# Allegro board pcb.brd
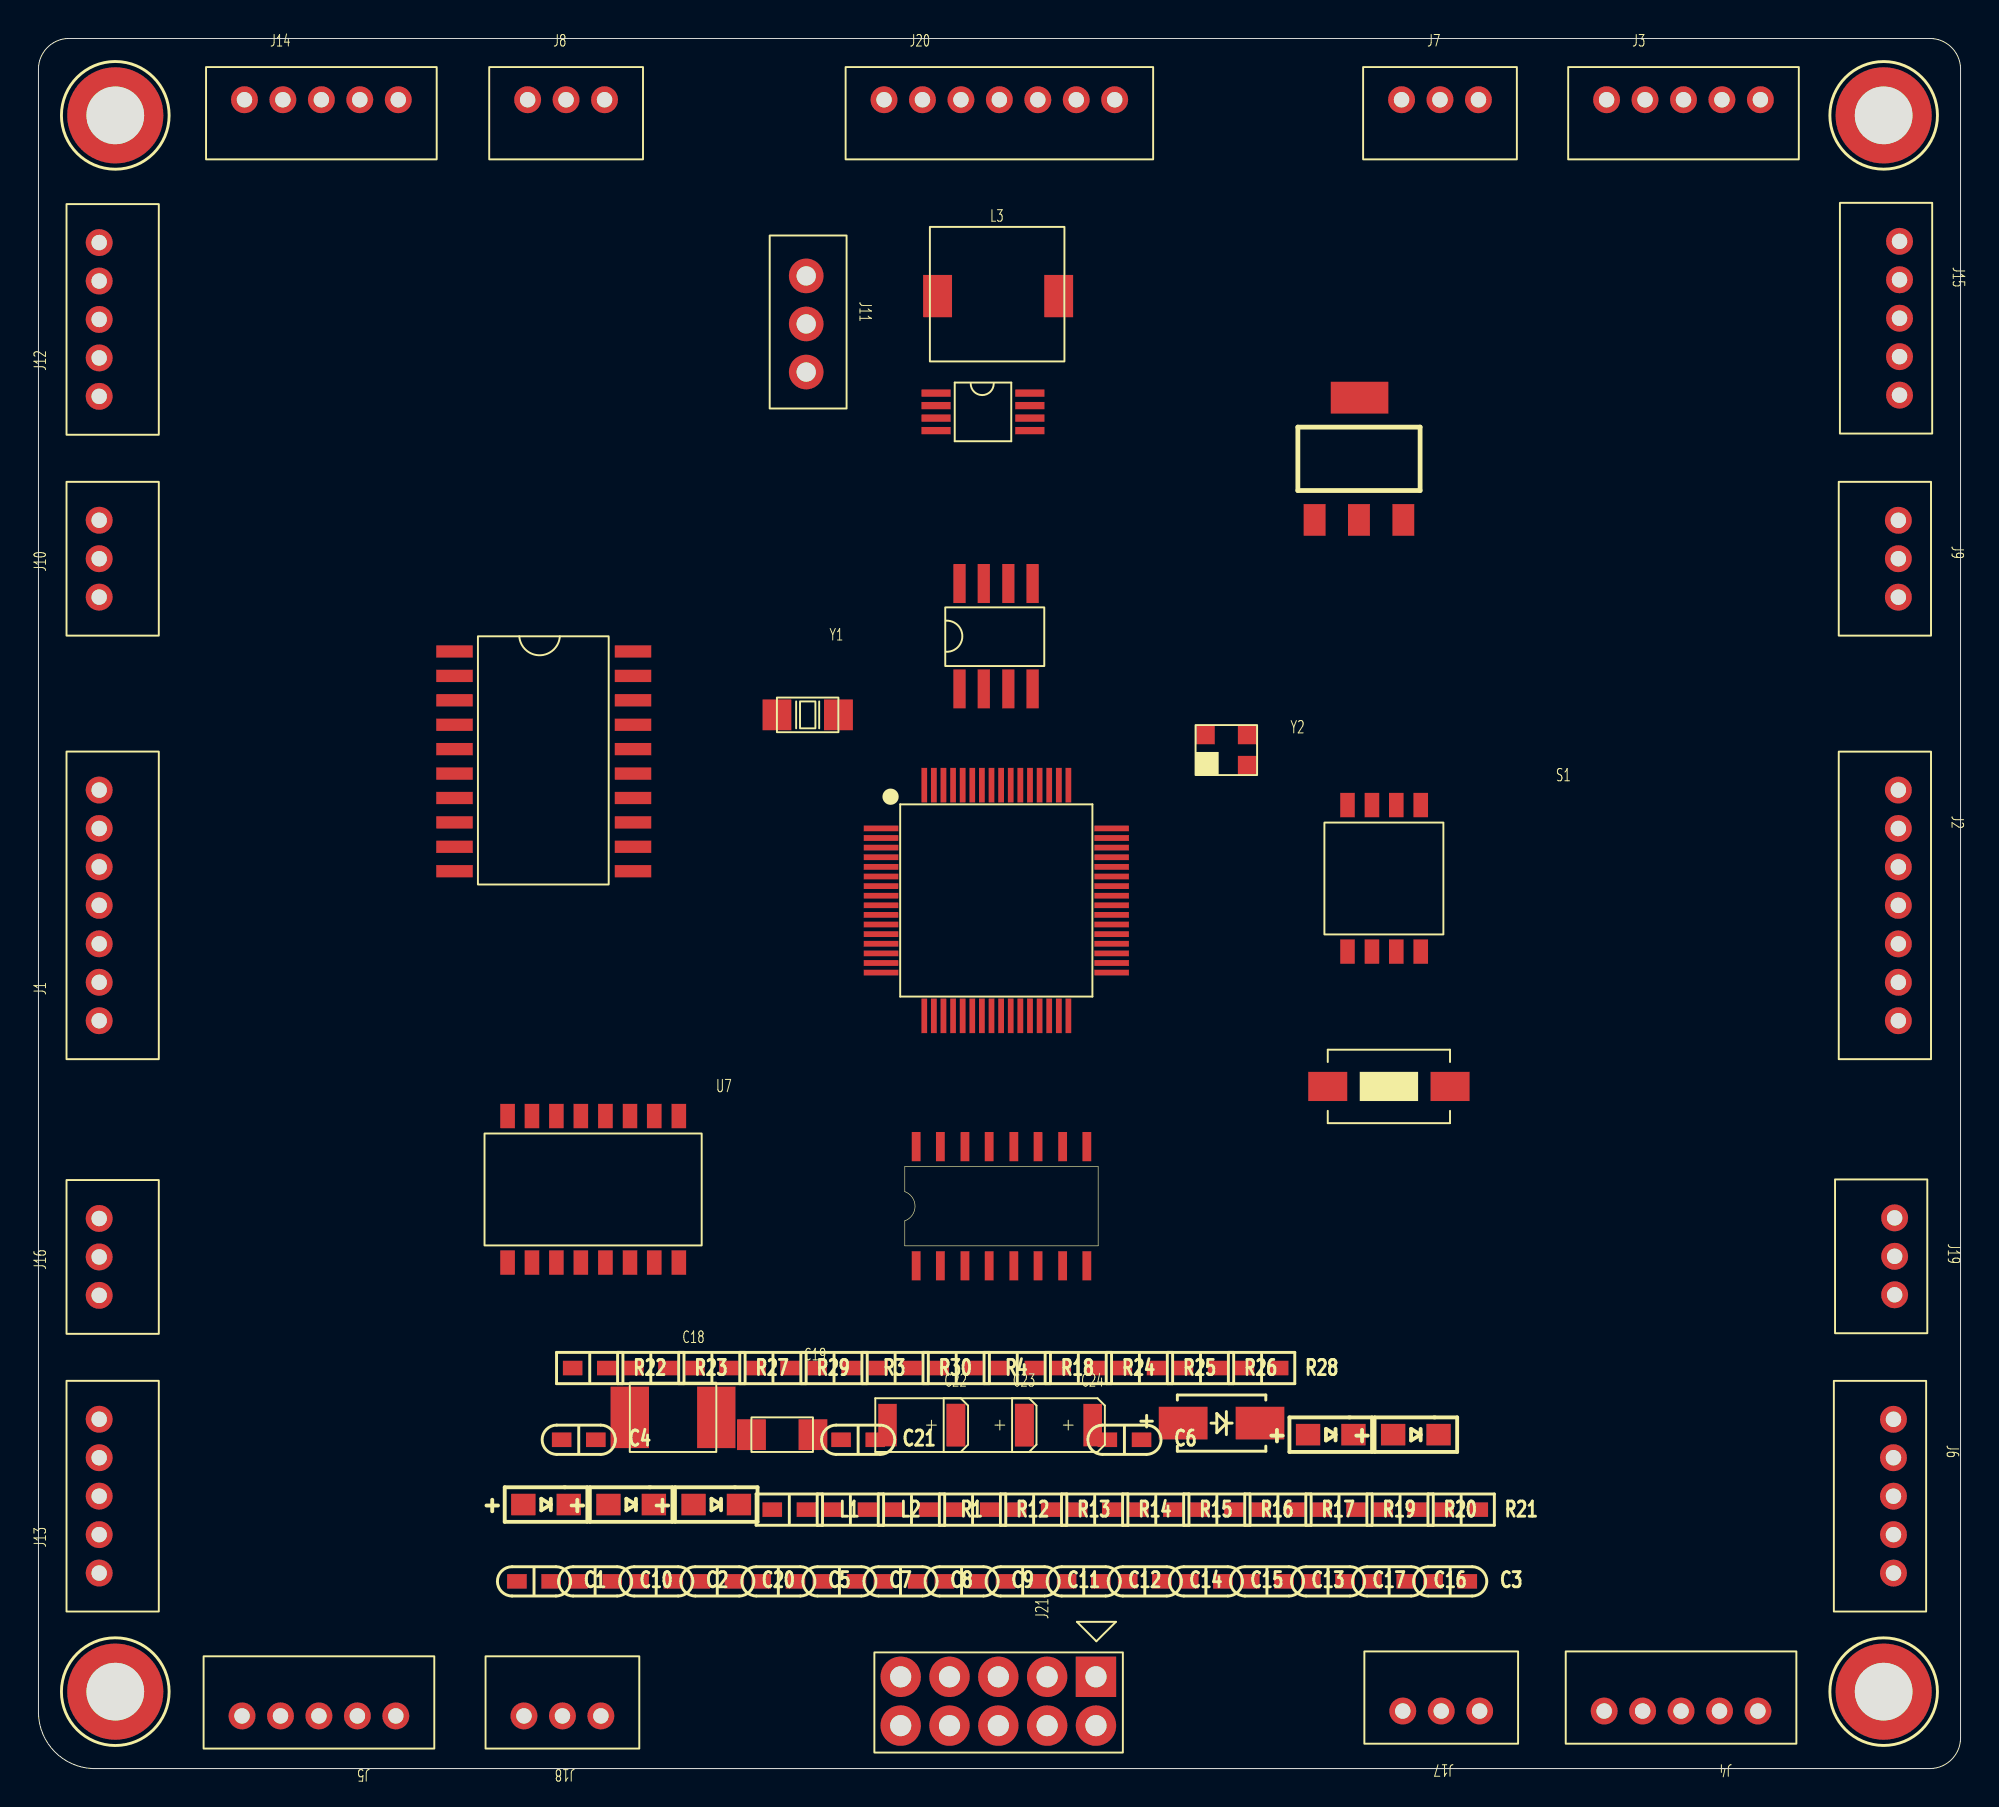
[diagram p0: board, top side]
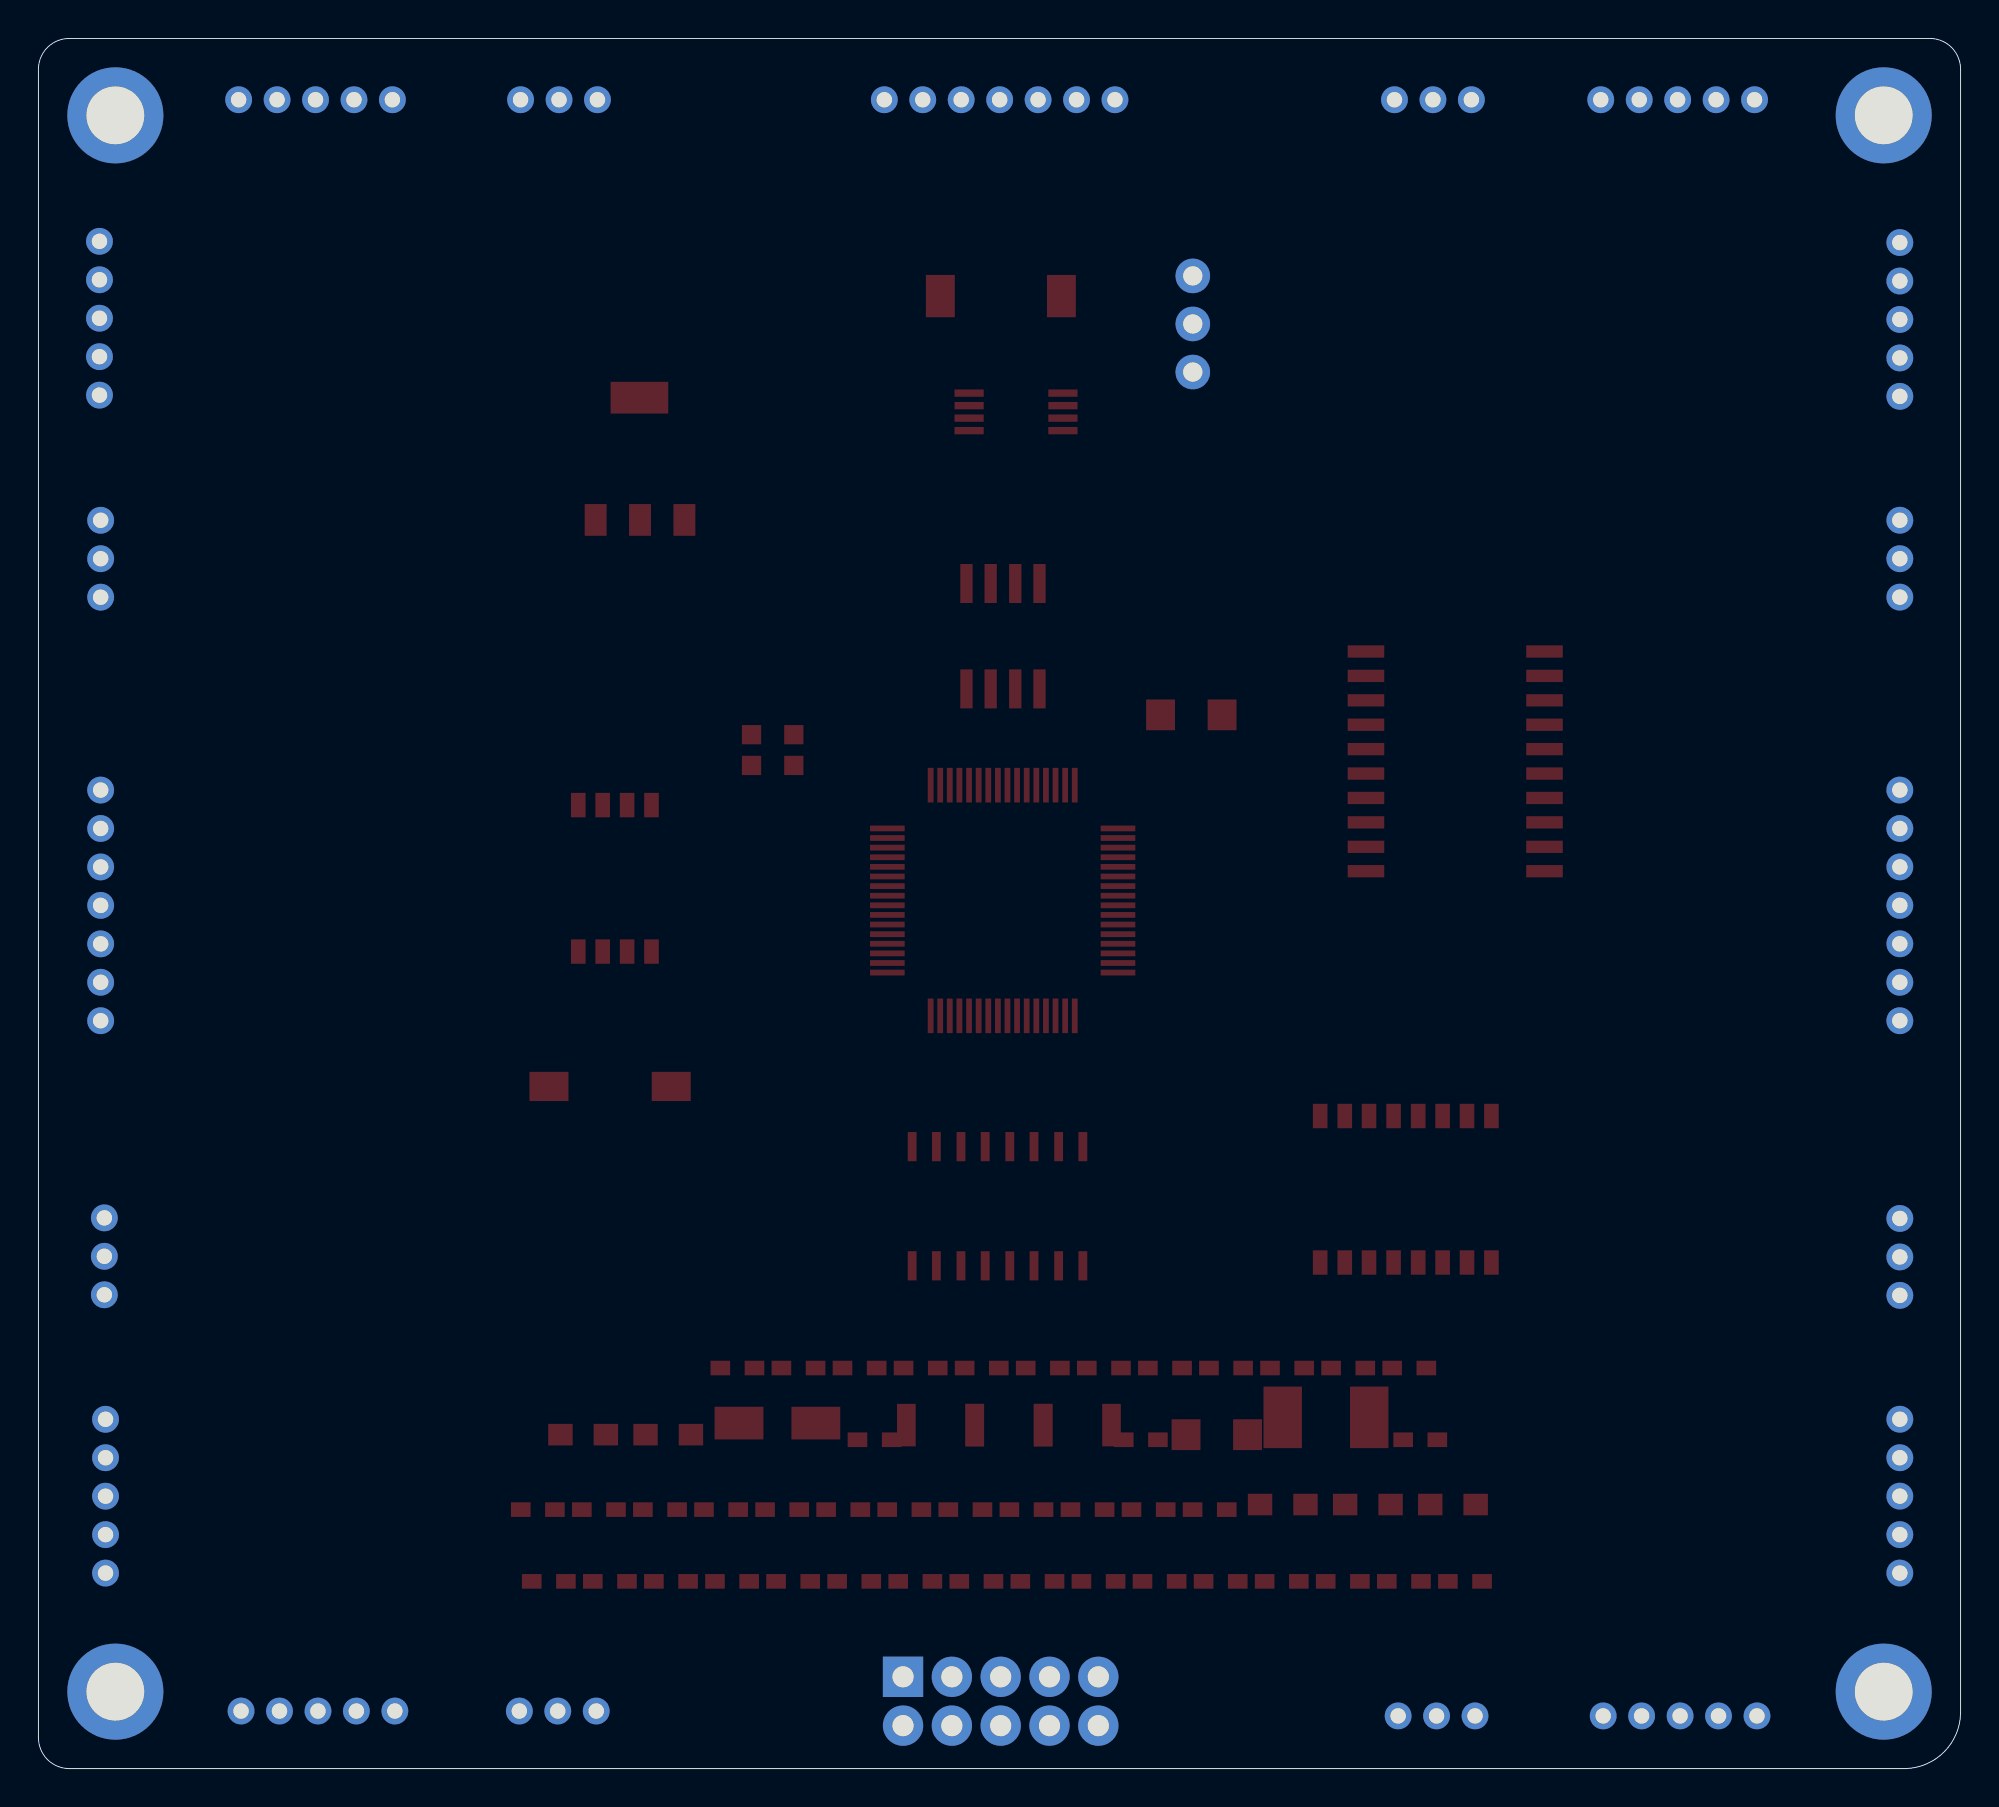
[diagram p1: board, bottom side, seen from below]

Outline 100 x 90 mm; copper layers: TOP, BOTTOM. Coordinates in mm from the lower left corner of the outline.
Outline path: 0,88.4 arc(0.44,89.51) 1.53,90 98.4,90 arc(99.51,89.56) 100,88.47 100,1.6 arc(99.54,0.48) 98.43,0 2.82,0 arc(0.84,0.88) 0,2.88 0,88.4

## Placement (name value [footprint] x y rotation side)
C1  0.1uF  [C0603]  25.78 9.74 0 top
C2  0.1uF  [C0603]  32.14 9.74 0 top
C3  0.1uF  [C0603]  73.45 9.74 0 top
C4  0.1uF  [C0603]  28.11 17.1 0 top
C5  0.1uF  [C0603]  38.49 9.74 0 top
C6  10uF  [C0603]  56.5 17.1 0 top
C7  0.1uF  [C0603]  41.67 9.74 0 top
C8  0.1uF  [C0603]  44.85 9.74 0 top
C9  0.1uF  [C0603]  48.03 9.74 0 top
C10  0.1uF  [C0603]  28.96 9.74 0 top
C11  20p  [C0603]  51.2 9.74 0 top
C12  20p  [C0603]  54.38 9.74 0 top
C13  1uF  [C0603]  63.91 9.74 0 top
C14  20p  [C0603]  57.56 9.74 0 top
C15  20p  [C0603]  60.74 9.74 0 top
C16  0.1uF  [C0603]  70.27 9.74 0 top
C17  1uF  [C0603]  67.09 9.74 0 top
C18  1uF/100V C4532X7R2A105M  [C4532]  30.76 18.27 0 top
C19  0.1uF/100V C3216X7R2A104KT  [C3216]  37.09 17.37 0 top
C20  0.1uF  [C0603]  35.32 9.74 0 top
C21  0.01uF  [C0603]  42.65 17.1 0 top
C22  47uF/6.3V  [C3528]  45.95 17.87 0 top
C23  10uF/16V  [C3528]  49.51 17.87 0 top
C24  10uF/16V  [C3528]  53.07 17.87 0 top
D1  B260A  [SMA]  61.55 17.97 0 top
DS1  LED  [LED0805]  67.23 17.37 0 top
DS2  LED  [LED0805]  71.66 17.37 0 top
DS3  LED  [LED0805]  26.41 13.73 0 top
DS4  LED  [LED0805]  30.84 13.73 0 top
DS5  LED  [LED0805]  35.26 13.73 0 top
H4  MOUNT_HOLE  [HOLE197-118]  96 4 0 top
H5  MOUNT_HOLE  [HOLE197-118]  4 4 0 top
H6  MOUNT_HOLE  [HOLE197-118]  96 86 0 top
H7  MOUNT_HOLE  [HOLE197-118]  4 86 0 top
J1  CON7  [PH20_7]  3.16 38.9 90 top
J2  CON7  [PH20_7]  96.76 50.9 270 top
J3  CON5  [PH20_5]  81.58 86.81 0 top
J4  CON5  [PH20_5]  89.46 2.99 180 top
J5  CON5  [PH20_5]  18.59 2.74 180 top
J6  CON5  [PH20_5]  96.51 18.17 270 top
J7  CON3  [PH20_3]  70.92 86.81 0 top
J8  CON3  [PH20_3]  25.45 86.81 0 top
J9  CON3  [PH20_3]  96.76 64.94 270 top
J10  CON3  [PH20_3]  3.16 60.94 90 top
J11  SW  [SW-3]  39.94 77.65 270 top
J12  CON5  [PH20_5]  3.16 71.38 90 top
J13  CON5  [PH20_5]  3.16 10.17 90 top
J14  CON5  [PH20_5]  10.72 86.81 0 top
J15  CON5  [PH20_5]  96.82 79.45 270 top
J16  CON3  [PH20_3]  3.16 24.62 90 top
J17  CON3  [PH20_3]  74.98 2.99 180 top
J18  CON3  [PH20_3]  29.26 2.74 180 top
J19  CON3  [PH20_3]  96.57 28.65 270 top
J20  CON7  [PH20_7]  43.99 86.81 0 top
J21  CONN PCB 5x2-S  [10PIN]  55.02 2.23 90 top
L1  FERRITE BEAD  [L0603]  39.07 13.47 0 top
L2  FERRITE BEAD  [L0603]  42.24 13.47 0 top
L3  100uH(SLF7045T-101MR50-PF)  [L7X7]  46.78 76.6 0 top
R1  10K  [R0603]  45.42 13.47 0 top
R3  1K  [R0603]  41.39 20.84 0 top
R4  1K  [R0603]  47.75 20.84 0 top
R12  33  [R0603]  48.6 13.47 0 top
R13  10M  [R0603]  51.78 13.47 0 top
R14  1M  [R0603]  54.95 13.47 0 top
R15  120 NC  [R0603]  58.13 13.47 0 top
R16  1K  [R0603]  61.31 13.47 0 top
R17  1K  [R0603]  64.49 13.47 0 top
R18  200K  [R0603]  50.92 20.84 0 top
R19  1K  [R0603]  67.66 13.47 0 top
R20  1K  [R0603]  70.84 13.47 0 top
R21  1K  [R0603]  74.02 13.47 0 top
R22  1K  [R0603]  28.68 20.84 0 top
R23  1K  [R0603]  31.86 20.84 0 top
R24  100K  [R0603]  54.1 20.84 0 top
R25  1.62K  [R0603]  57.28 20.84 0 top
R26  1  [R0603]  60.46 20.84 0 top
R27  1K  [R0603]  35.04 20.84 0 top
R28  1K  [R0603]  63.63 20.84 0 top
R29  1K  [R0603]  38.21 20.84 0 top
R30  1K  [R0603]  44.57 20.84 0 top
S1  SW_DIP-4  [SW4]  73.84 46.31 0 top
SW1  PUSH BOTTOM  [KEY_SMD]  70.26 35.48 0 top
U1  MAX232AESE  [SO16]  50.1 29.25 90 top
U2  74HC245D  [SOIC20]  21.89 58.11 0 top
U3  NUC140RE3CN  [LQFP64]  49.83 45.16 0 top
U4  MAX490ESA  [SOIC8]  49.82 58.91 90 top
U5  LM5007MM  [MSOP-8]  46.7 71.55 0 top
U6  LM1117IMPX-5.0  [SOT_223_G]  68.7 68.13 0 top
U7  SWICH8  [SW8]  30.14 30.13 0 top
Y1  32.768KHz  [Y3215]  38.42 54.81 0 top
Y2  12MHz  [CRYSTAL3225]  60.7 52.18 0 top

## Library data of the parts
C1 C2 C5 C7-C10 C18-C24 = CAP NP
C3 C4 C6 C11-C17 = CAP-C_0
D1 = ZHCS750/SOT_0
DS1-DS5 = LED-0603-LTST-C190GKT_1: Tolerance: #TOL; User Part Number: HAMP
H4-H7 = MOUNT_HOLE
J1 J2 J20 = CON7
J3-J6 J12-J15 = CON5
J7-J10 J16-J19 = CON3
J11 = CON3_0
J21 = CONN PCB 5x2-S
L1 L2 = INDUCTOR_0
L3 = INDUCTOR
R1 R3 R4 R12-R17 R19-R23 R27 R29 R30 = R_0
R18 R24-R26 R28 = R
S1 = SW_DIP4_0
SW1 = SW PUSHBUTTON
U1 = MAX232I/SO
U2 = 74HCT245_2: User Part Number: ***; Tolerance: ***
U3 = NCU120_LQFP_1
U4 = MAX490ESA: Tolerance: ***; User Part Number: ***
U5 = DD_0
U6 = LM1117_0
U7 = SWICH8
Y1 = CRYSTAL
Y2 = Crystal/SMD

## Footprints (pads in the part's own frame, mm; a bottom-side part is the same pattern mirrored in y, then rotated)
10PIN
  rect 2.101x2.101 hole 1.1: 1(2.54,0)
  round 2.101 hole 1.1: 2(0,0) 3(2.54,2.54) 4(0,2.54) 5(2.54,5.08) 6(0,5.08) 7(2.54,7.62) 8(0,7.62) 9(2.54,10.16) 10(0,10.16)
C0603
  rect 1.021x0.759 smd: 1(-0.889,0) 2(0.889,0)
C3216
  rect 1.501x1.6 smd: 1(0,0) 2(3.2,0)
C3528
  rect 0.97x2.21 smd: 1(1.778,0) 2(-1.778,0)
C4532
  rect 1.999x3.2 smd: 1(0,0) 2(4.501,0)
CRYSTAL3225
  rect 1.001x1.001 smd: 1(0,0) 2(2.2,0) 3(2.2,1.6) 4(0,1.6)
HOLE197-118
  round 5.001 hole 3: 1(0,0)
KEY_SMD
  rect 2.029x1.519 smd: 1(-3.18,0) 2(3.18,0)
L7X7
  rect 1.501x2.2 smd: 1(0,0) 2(6.299,0)
L0603
  rect 1.021x0.759 smd: 1(-0.889,0) 2(0.889,0)
LED0805
  rect 1.27x1.12 smd: 1(-1.181,0) 2(1.181,0)
LQFP64
  rect 1.801x0.3 smd: 1(-5.999,3.749) 2(-5.999,3.251) 3(-5.999,2.751) 4(-5.999,2.25) 5(-5.999,1.75) 6(-5.999,1.25) 7(-5.999,0.749) 8(-5.999,0.249) 9(-5.999,-0.249) 10(-5.999,-0.749) 11(-5.999,-1.25) 12(-5.999,-1.75) 13(-5.999,-2.25) 14(-5.999,-2.751) 15(-5.999,-3.251) 16(-5.999,-3.749) 33(5.999,-3.749) 34(5.999,-3.251) 35(5.999,-2.751) 36(5.999,-2.25) 37(5.999,-1.75) 38(5.999,-1.25) 39(5.999,-0.749) 40(5.999,-0.249) 41(5.999,0.249) 42(5.999,0.749) 43(5.999,1.25) 44(5.999,1.75) 45(5.999,2.25) 46(5.999,2.751) 47(5.999,3.251) 48(5.999,3.749)
  rect 0.3x1.801 smd: 17(-3.749,-5.999) 18(-3.251,-5.999) 19(-2.751,-5.999) 20(-2.25,-5.999) 21(-1.75,-5.999) 22(-1.25,-5.999) 23(-0.749,-5.999) 24(-0.249,-5.999) 25(0.249,-5.999) 26(0.749,-5.999) 27(1.25,-5.999) 28(1.75,-5.999) 29(2.25,-5.999) 30(2.751,-5.999) 31(3.251,-5.999) 32(3.749,-5.999) 49(3.749,5.999) 50(3.251,5.999) 51(2.751,5.999) 52(2.25,5.999) 53(1.75,5.999) 54(1.25,5.999) 55(0.749,5.999) 56(0.249,5.999) 57(-0.249,5.999) 58(-0.749,5.999) 59(-1.25,5.999) 60(-1.75,5.999) 61(-2.25,5.999) 62(-2.751,5.999) 63(-3.251,5.999) 64(-3.749,5.999)
MSOP-8
  rect 1.519x0.381 smd: 1(0,0) 2(0,-0.65) 3(0,-1.3) 4(0,-1.951) 5(4.879,-1.951) 6(4.879,-1.3) 7(4.879,-0.65) 8(4.879,0)
PH20_3
  round 1.4 hole 0.8: 1(0,0) 2(1.999,0) 3(4,0)
PH20_5
  round 1.4 hole 0.8: 1(0,0) 2(1.999,0) 3(4,0) 4(5.999,0) 5(8.001,0)
PH20_7
  round 1.4 hole 0.8: 1(0,0) 2(1.999,0) 3(4,0) 4(5.999,0) 5(8.001,0) 6(10,0) 7(11.999,0)
R0603
  rect 1.021x0.759 smd: 1(-0.889,0) 2(0.889,0)
SMA
  rect 2.54x1.699 smd: 1(1.999,0) 2(-1.999,0)
SO16
  rect 1.519x0.46 smd: 1(-3.099,4.44) 2(-3.099,3.18) 3(-3.099,1.9) 4(-3.099,0.64) 5(-3.099,-0.64) 6(-3.099,-1.9) 7(-3.099,-3.18) 8(-3.099,-4.44) 9(3.099,-4.44) 10(3.099,-3.18) 11(3.099,-1.9) 12(3.099,-0.64) 13(3.099,0.64) 14(3.099,1.9) 15(3.099,3.18) 16(3.099,4.44)
SOIC8
  rect 2.029x0.64 smd: 1(-2.741,1.9) 2(-2.741,0.64) 3(-2.741,-0.64) 4(-2.741,-1.9) 5(2.741,-1.9) 6(2.741,-0.64) 7(2.741,0.64) 8(2.741,1.9)
SOIC20
  rect 1.9x0.64 smd: 1(-0.249,0) 2(-0.249,-1.27) 3(-0.249,-2.54) 4(-0.249,-3.81) 5(-0.249,-5.08) 6(-0.249,-6.35) 7(-0.249,-7.62) 8(-0.249,-8.89) 9(-0.249,-10.16) 10(-0.249,-11.43) 11(9.04,-11.43) 12(9.04,-10.16) 13(9.04,-8.89) 14(9.04,-7.62) 15(9.04,-6.35) 16(9.04,-5.08) 17(9.04,-3.81) 18(9.04,-2.54) 19(9.04,-1.27) 20(9.04,0)
SOT_223_G
  rect 1.14x1.651 smd: 1(-2.309,-3.18) 2(0,-3.18) 3(2.309,-3.18)
  rect 3x1.651 smd: 4(0.03,3.18)
SW4
  rect 0.759x1.27 smd: 1(-5.73,-3.81) 2(-4.46,-3.81) 3(-3.19,-3.81) 4(-1.92,-3.81) 5(-1.92,3.81) 6(-3.19,3.81) 7(-4.46,3.81) 8(-5.73,3.81)
SW8
  rect 0.759x1.27 smd: 1(-5.73,-3.81) 2(-4.46,-3.81) 3(-3.19,-3.81) 4(-1.92,-3.81) 5(-0.64,-3.81) 6(0.64,-3.81) 7(1.9,-3.81) 8(3.18,-3.81) 9(3.18,3.81) 10(1.9,3.81) 11(0.64,3.81) 12(-0.64,3.81) 13(-1.92,3.81) 14(-3.19,3.81) 15(-4.46,3.81) 16(-5.73,3.81)
SW-3
  round 1.801 hole 1.001: 1(0,0) 2(2.499,0) 3(5.001,0)
Y3215
  rect 1.501x1.6 smd: 1(0,0) 2(3.2,0)

## Nets
DGND: C1.2 C3.1 C4.1 C6.1 C8.1 C9.2 C10.2 C11.1 C12.1 C13.1 C14.1 C15.1 C16.1 C17.1 C18.2 C19.2 C20.2 C22.2 C23.2 C24.2 D1.1 DS5.2(CATHODE) H4.1 H5.1 H6.1 H7.1 J1.7 J2.7 J3.5 J4.5 J5.5 J6.5 J7.2 J8.2 J9.2 J10.2 J12.5 J13.5 J14.5 J15.5 J16.2 J17.2 J18.2 J19.2 J20.7 J21.10 L2.2 R19.2 R20.2 R21.2 R23.2 R24.1 R28.1 SW1.1 U1.15(GND) U2.10(GND) U2.19(O\E\) U3.16(VSS1) U3.61(VSS2) U3.63(PVSS) U4.4 U5.4(RTN) U6.1(GND/ADJ) Y2.2 Y2.4
DVCC5: C1.1 C2.2 C3.2 C9.1 C10.1 C16.2 C22.1 J1.1 J2.1 J3.1 J4.1 J5.1 J6.1 J7.3 J8.3 J9.3 J10.3 J12.1 J13.1 J14.1 J15.1 J16.3 J17.3 J18.3 J19.3 J21.2(6) L1.1 R1.2 R3.2 R4.2 R16.2 R17.2 R22.2 R27.2 R29.2 R30.2 S1.5(B4) S1.6(B3) S1.7(B2) S1.8(B1) U1.16(VCC) U2.1(DIR) U2.20(VCC) U3.15(VDD1) U3.62(VDD2) U4.1(VCC) U6.2(OUT1) U6.4(OUT2)
ADC0: J7.1 U3.44(PA.0/ADC0)
ADC1: J8.1 U3.45(PA.1/ADC1/AD12)
ADC2: J9.1 U3.46(PA.2/ADC2/AD11)
ADC3: J10.1 U3.47(PA.3/ADC3/AD10)
ADC4: J16.1 U3.48(PA.4/ADC4/AD9)
ADC5: J17.1 U3.49(AD8/ADC5/PA.5)
ADC6: J18.1 U3.50(AD7/ADC6/PA.6)
ADC7: J19.1 U3.51(AD6/ADC7PA.7)
D12MI: C15.2 R14.1 U3.59(XT1_IN) Y2.3
D12MO: R12.1 U3.58(XT1_OUT)
DAVDD: C4.2 L1.2 U3.52(AVDD)
DAVSS: L2.1 U3.43(AVSS)
DC6.5V: C23.1 L3.2 R25.2 R26.2 U6.3(IN)
DC48V: C18.1 C19.1 J11.2 R18.2 U5.8(VIN)
DOOR_SW: J20.6 R30.1
DX32I: C14.2 R13.1 U3.5(X32I) Y1.2
DX32O: C11.2 R13.2 U3.4(X32O) Y1.1
GPIO0: U2.9(A7)
GPIO0_EXT: J1.2 U2.11(B7)
GPIO1: U2.12(B6)
GPIO1_EXT: J1.3 U2.8(A6)
GPIO2: U7.1 U7.11
GPIO2_EXT: J1.4 U7.2 U7.12
GPIO3: U2.5(A3)
GPIO3_EXT: J2.2 U2.15(B3)
GPIO4: U2.16(B2)
GPIO4_EXT: J2.3 U2.4(A2)
GPIO5: U7.3 U7.9
GPIO5_EXT: J2.4 U7.4 U7.10
I2C0_SCL: J3.3 J4.3 J5.3 J6.3 J12.3 J13.3 J14.3 J15.3 R3.1 U3.8(I2C0SCL/PA.9)
I2C0_SDA: J3.2 J4.2 J5.2 J6.2 J12.2 J13.2 J14.2 J15.2 R4.1 U3.9(I2C0SDA/PA.8)
ICECLK: J21.6(8) U3.42(ICE_CK)
ICEDAT: J21.4(7) U3.41(ICE_DAT)
ICERST: C6.2 J21.8(9) R1.1 SW1.2 U3.60(/RESET)
LED1: DS1.2(CATHODE)
LED2: DS2.2(CATHODE)
LED3: DS3.2(CATHODE)
LED4: DS4.2(CATHODE)
RXD0_485+: J20.4 R15.2 U4.8(A)
RXD0_485-: J20.5 R15.1 U4.7(B)
RXD0_TTL: U3.21(PB.0/RXD0) U4.2(RO)
RXD1_232: J1.6 U1.13(R1IN)
RXD1_TTL: U1.12(R\1\O\U\T\) U3.10(RXD1/PB.4)
RXD2_232: J2.6 U1.8(R2IN)
RXD2_TTL: U1.9(R\2\O\U\T\) U3.27(PD.14/RXD2)
SW1: R23.1 S1.4(A4)
SW2: R21.1 S1.3(A3)
SW3: R20.1 S1.2(A2)
SW4: R19.1 S1.1(A1)
TXD0_485+: J20.2 U4.5(Y)
TXD0_485-: J20.3 U4.6(Z)
TXD0_TTL: U3.22(PB.1/TXD0) U4.3(DI)
TXD1_232: J1.5 U1.14(T\1\O\U\T\)
TXD1_TTL: U1.11(T1IN) U3.11(TXD1/PB.5)
TXD2_232: J2.5 U1.7(T\2\O\U\T\)
TXD2_TTL: U1.10(T2IN) U3.28(PD.15/TXD2)
N16792821: C12.2 R12.2 R14.2 Y2.1
N16829506: DS1.1(ANODE) R16.1
N16842654: C13.2 U3.14(LDO)
N16842979: C17.2 U3.18(VDD33)
N16844783: C2.1 U1.2(V+)
N16847896: DS2.1(ANODE) R17.1
N16848060: DS3.1(ANODE) R22.1
N16848148: DS4.1(ANODE) R27.1
N16848238: DS5.1(ANODE) R29.1
N16853994: J11.1 J20.1
N16858260: R18.1 U5.6(RON)
N16858566: R24.2 U5.3(RCL)
N16858684: C21.2 D1.2 L3.1 U5.1(SW)
N16859031: R25.1 R28.2 U5.5(FB)
N16859274: C21.1 U5.2(BST)
N16859316: C20.1 U5.7(VCC)
N16859558: C24.1 R26.1
N16868564: U2.7(A5) U7.16
N16868580: U2.6(A4) U7.15
N16868614: U2.13(B5) U7.5
N16868615: U2.14(B4) U7.6
N16869701: U2.3(A1) U7.14
N16869711: U2.2(A0) U7.13
N16869796: U2.18(B0) U7.8
N16869798: U2.17(B1) U7.7
N168447690: C5.1 U1.1(C1+)
N168447691: C5.2 U1.3(C1-)
N168447692: C7.1 U1.4(C2+)
N168447693: C7.2 U1.5(C2-)
N168447697: C8.2 U1.6(V-)

Pads without a net: J3 4; J4 4; J5 4; J6 4; J11 3; J12 4; J13 4; J14 4; J15 4; J21 1 3 5 7 9; U3 1 2 3 6 7 12 13 17 19 20 23 24 25 26 29 30 31 32 33 34 35 36 37 38 39 40 53 54 55 56 57 64
